# Altium PCB wacky-hat.PcbDoc (part 1 of 2)
Units mm, origin at the board's own origin, x right, y up, seen from the top; angles counter-clockwise.
Board outline 64 x 85 mm, 4 copper layers (Top Layer, Ground Plane, Power Plane, Bottom Layer), stack 0.844 mm thick; 113 components, 70 nets, 320 pads, 108 vias.
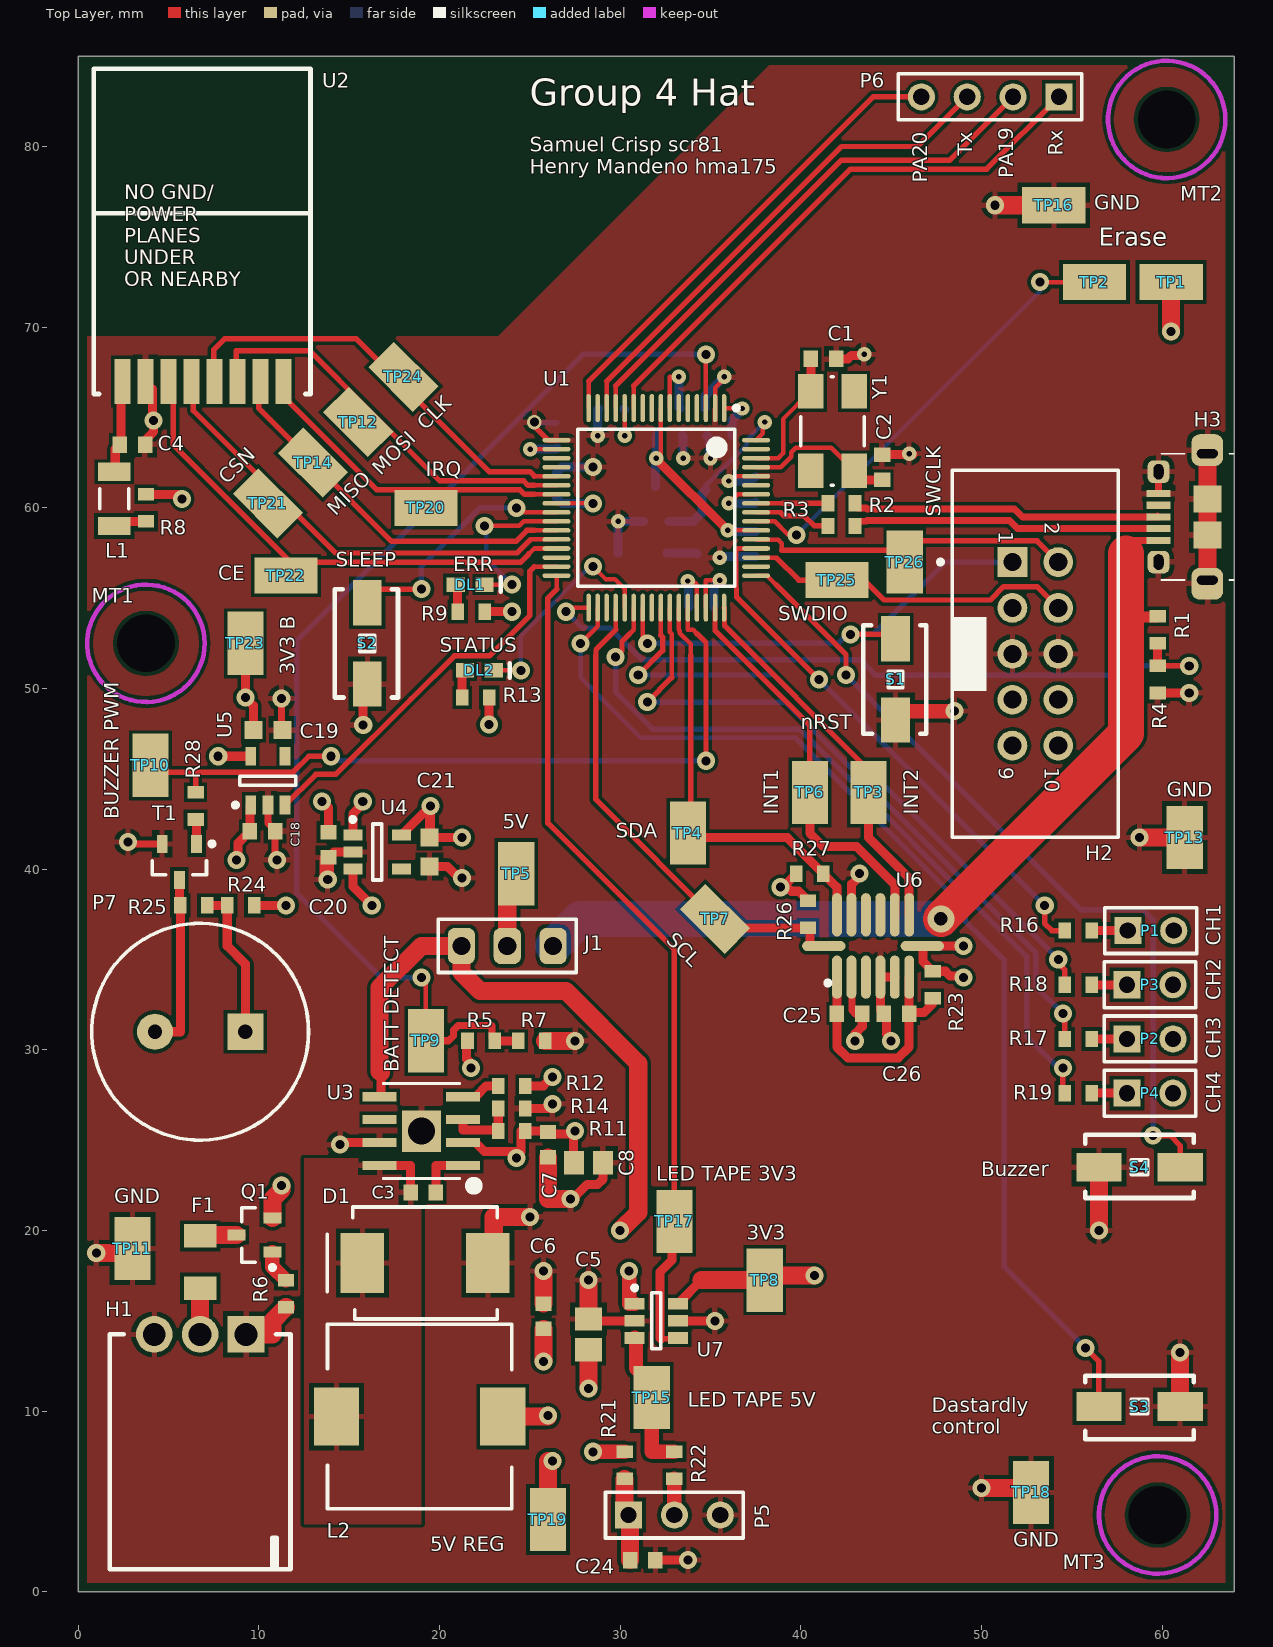
[diagram p0: Top Layer view]
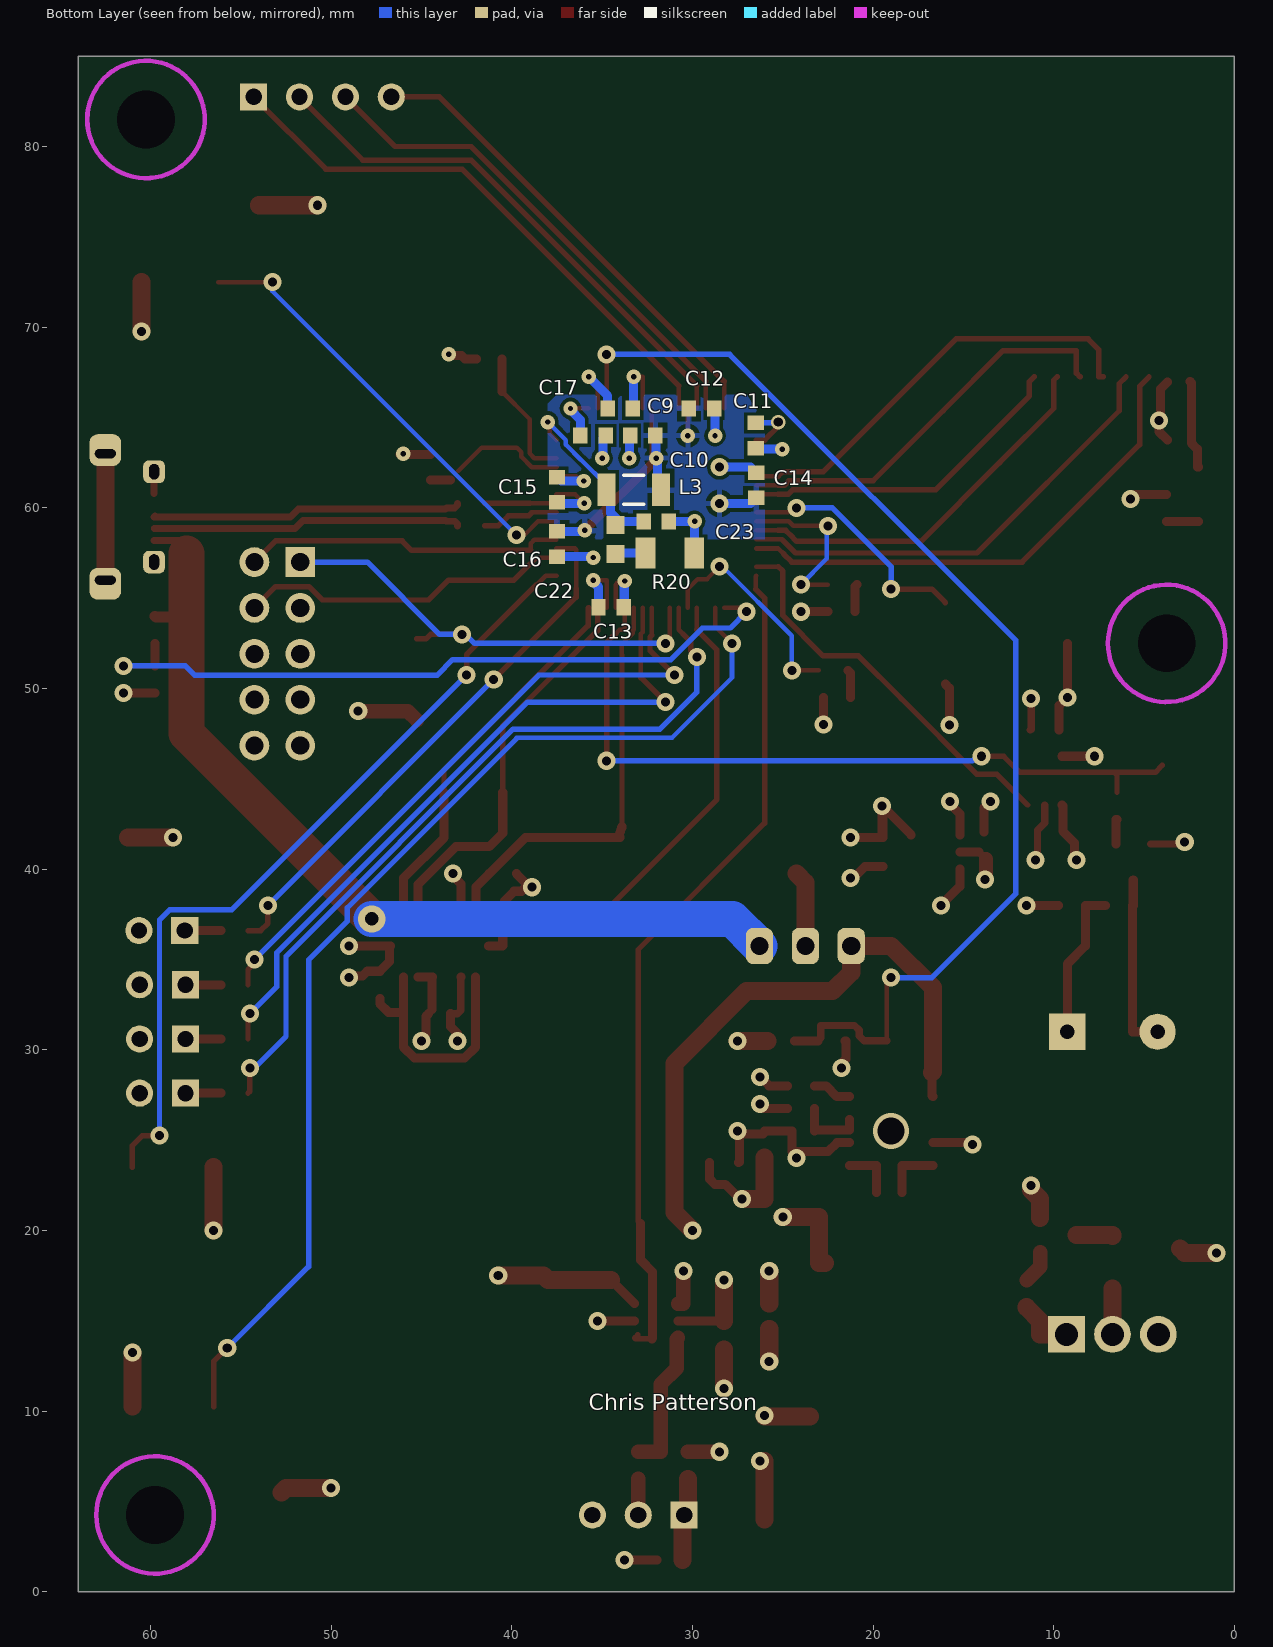
[diagram p1: Bottom Layer view, seen from below]
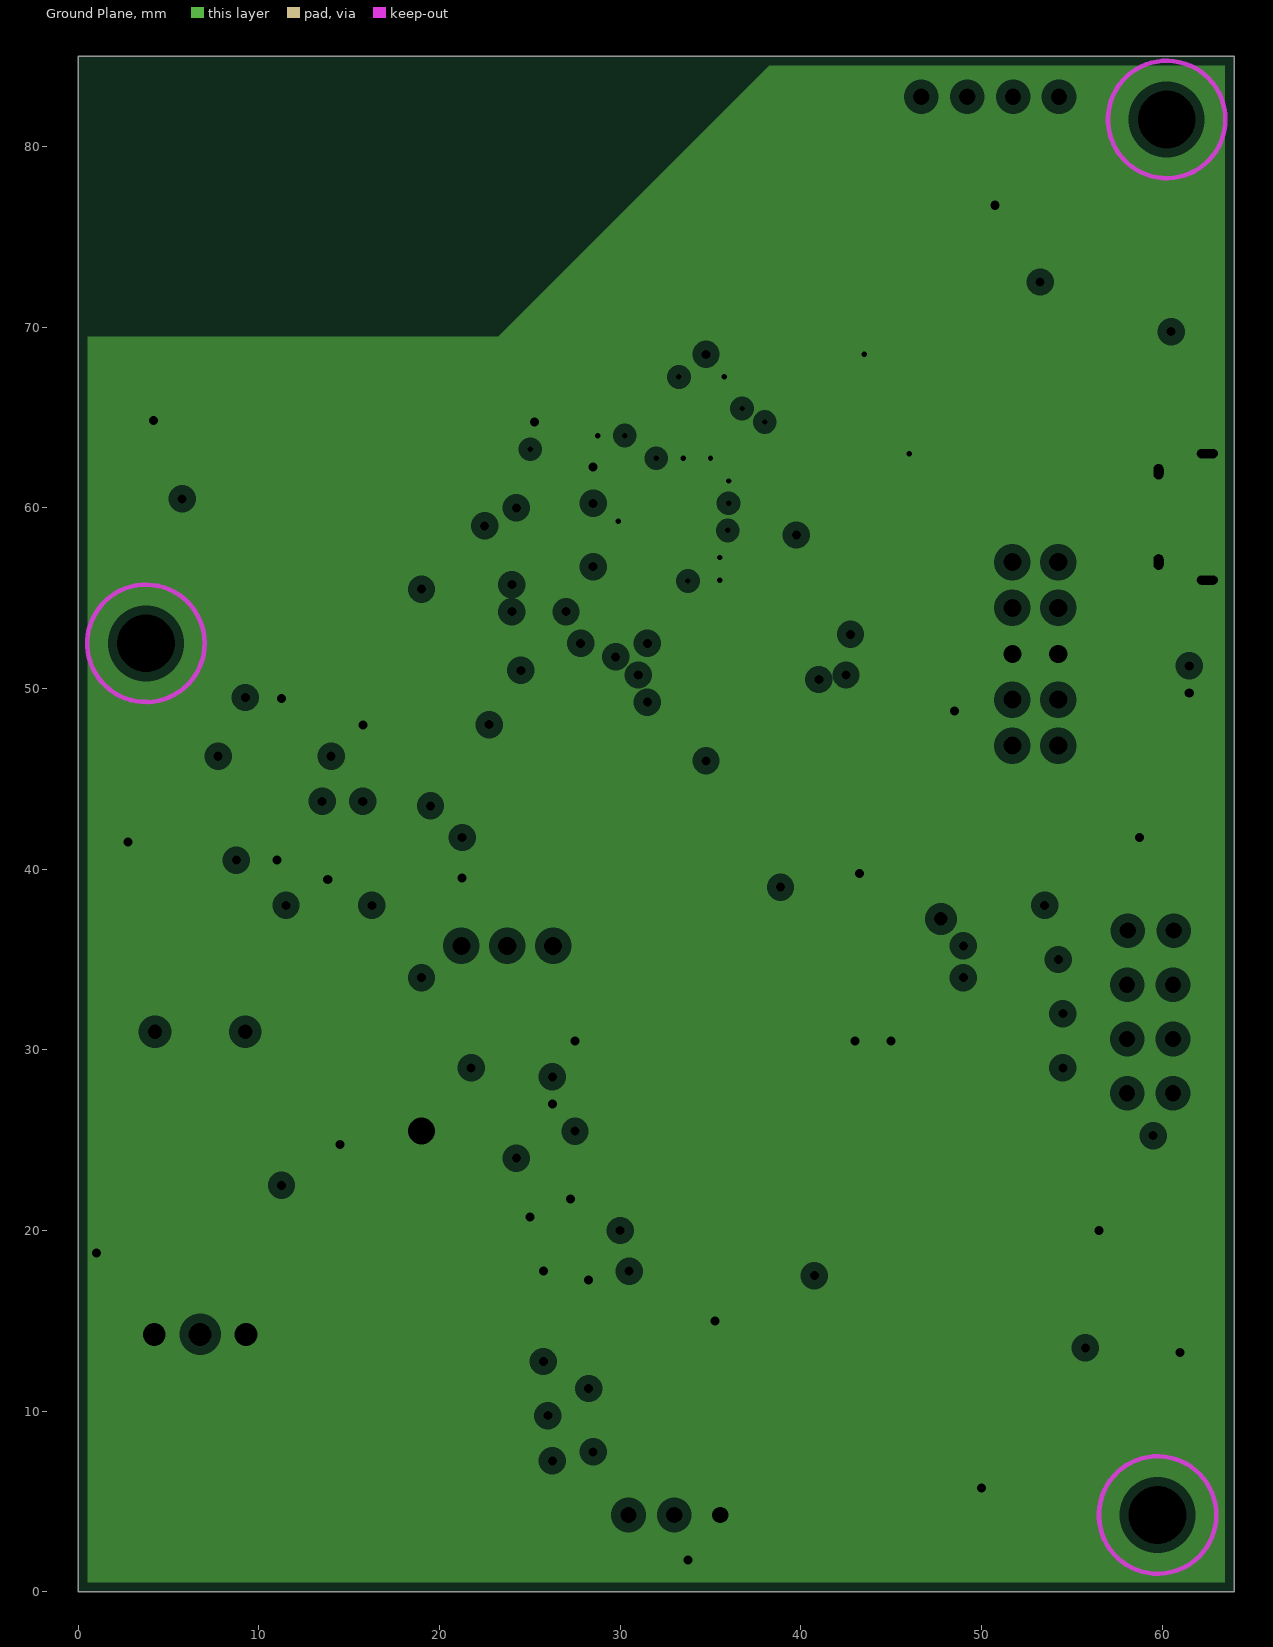
[diagram p2: Ground Plane, clearances drawn from the general rule]
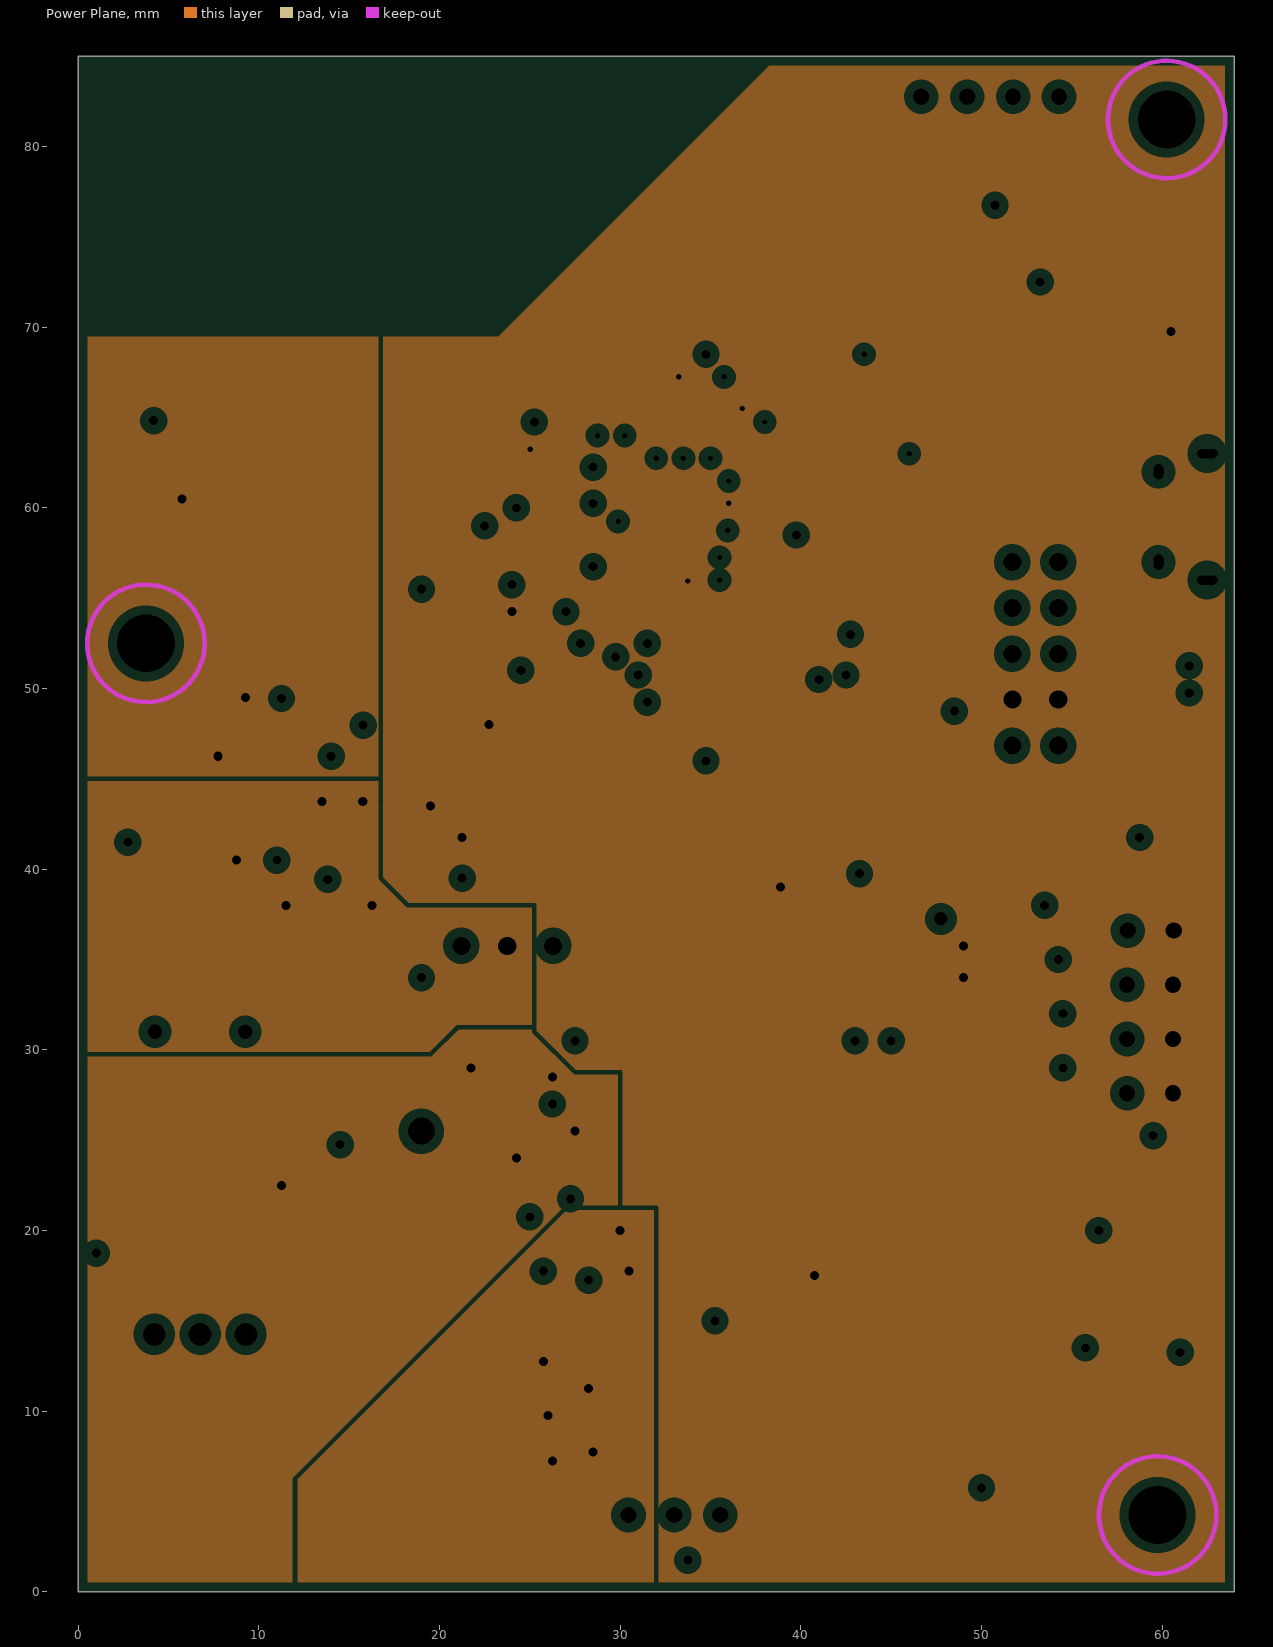
[diagram p3: Power Plane, clearances drawn from the general rule]

## Layer stack, top to bottom
Top Solder: solder mask 0.0102, Solder Resist, Dk 3.5
Top Layer: signal copper 0.0356
Dielectric 1: core 0.32, FR-4, Dk 4.8
Ground Plane: plane copper 0.036, net GND
Dielectric 3: prepreg 0.127, Dk 4.2
Power Plane: plane copper 0.036, net (Multiple Nets)
Dielectric 4: core 0.254, Dk 4.2
Bottom Layer: signal copper 0.0356
Bottom Solder: solder mask 0.0102, Solder Resist, Dk 3.5

## Board outline
0,85 64,85 64,0 0,0 0,85

## Design rules (kind name [scope] priority, off if disabled: settings)
BoardOutlineClearance [All] p1: gap=0.5 ignorepadtopadclearanceinfootprint=FALSE
Clearance GND_POLY [InNamedPolygon('GND')] p1: gap=0.254 ignorepadtopadclearanceinfootprint=FALSE
Clearance Min_Clearance_Circuit_Labs [All] p2: gap=0.2 ignorepadtopadclearanceinfootprint=FALSE
DiffPairsRouting [All] p1: maxlimit=0.254 minlimit=0.254 mostfreqgap=0.254 toplayer_minwidth=0.381 toplayer_maxwidth=0.381 toplayer_prefwidth=0.381 bottomlayer_minwidth=0.381 bottomlayer_maxwidth=0.381 bottomlayer_prefwidth=0.381 maxuncoupledlength=12.7
FanoutControl Fanout_BGA [IsBGA] p1 off: bgadir=Out bgaviamode=Centered fanoutstyle=Auto fanoutdirection=Alternating viagrid=0.025 // Fanout_BGA (Default Rule)
Height [All] p1: minheight=0 maxheight=50.8 prefheight=12.7
HoleSize [All] p1: absolutevalues=TRUE maxlimit=10 minlimit=0.3 maxpercent=80.000 minpercent=20.000
MinimumAnnularRing [All] p1: minimumring=0.1
MinimumSolderMaskSliver [All] p1: minsoldermaskwidth=0.102
NetAntennae [All] p1: netantennaetolerance=1
PlaneClearance [All] p1: clearance=0.508
PlaneConnect [All] p1: planeconnectstyle=Relief reliefexpansion=0.508 reliefentries=4 reliefconductorwidth=0.254 reliefairgap=0.254
PolygonConnect [All] p1: connectstyle=Relief reliefconductorwidth=0.305 reliefentries=4 polygonreliefangle="90 Angle" airgapwidth=0.254
RoutingVias [All] p1: holewidth=0.5 width=1 viastyle="Through Hole" minholewidth=0.3 minwidth=0.8 maxholewidth=1 maxwidth=2
SMDNeckDown [All] p1 off: percent=50.000
SMDToCorner [All] p1: distance=98425
SMDToPlane [All] p1: distance=1968504
SilkToSolderMaskClearance SilkscreenOverComponentPads [IsPad] p1: minsilkscreentomaskgap=0.2 clearancetoexposedcopper=TRUE
SolderMaskExpansion [All] p1: expansion=0.102
ViasUnderSMD [All] p1: allowed=FALSE
Width [All] p1: maxlimit=2 minlimit=0.2 preferedwidth=0.3
21 further rules are at their usual default settings.

## Classes and differential pairs
differential pair class D_P: D
differential pair class D_N: D
differential pair D: +D_P -D_N

## Components (designator, comment, footprint, x,y, rotation, side; value= is the part's Value field where it differs from the comment)
C1 "27pF" CAPC1608L 41.25,68.25 r180 top
C2 "27pF" CAPC1608L 44.5,62.25 r270 top
C3 "100nF" CAPC1608L 19.1,22.1 r180 top
C4 "10uF" CAPC1608L 3,63.5 r180 top
C5 "CC_47uF_0805_6V3" CAPC2012N 28.25,14.25 r270 top
C6 "100nF" CAPC1608L 25.75,15.25 r270 top
C7 "100nF" CAPC1608L 26,24.75 r90 top
C8 "10uF" CAPC2012L 28.25,23.75 r180 top
C9 "100nF" CAPC1608L 34,65.5 r180 bottom
C10 "100nF" CAPC1608L 32.75,64 r180 bottom
C11 "100nF" CAPC1608L 26.5,64 r270 bottom
C12 "100nF" CAPC1608L 29.5,65.5 r0 bottom
C13 "100nF" CAPC1608L 34.5,54.5 r180 bottom
C14 "100nF" CAPC1608L 26.475,61.25 r270 bottom
C15 "100nF" CAPC1608L 37.5,61 r270 bottom
C16 "100nF" CAPC1608L 37.5,58 r90 bottom
C17 "100nF" CAPC1608L 35.5,64 r0 bottom
C18 "1uF" CAPC1608L 10.2,42.1 r180 top
C19 "4.7uF" CAPC1608N 10.5,47.7 r180 top
C20 "1uF" CAPC1608L 13.85,41.35 r90 top
C21 "4.7uF" CAPC1608N 19.45,40.95 r90 top
C22 "4.7uF" CAPC1608N 34.25,58.25 r270 bottom
C23 "100nF" CAPC1608L 32,59.25 r0 bottom
C24 "15pF" CAPC1608L 31.25,1.75 r180 top
C25 "100nF" CAPC1608L 42.7,32 r180 top
C26 "1uF" CAPC1608L 45.3,32 r0 top
D1 "MBRS330T3G 30V 4A" SMC 19.2,18.2 r180 top
DL1 "Red" WL-SMCW0603 22.5,55.75 r180 top
DL2 "Green" WL-SMCW0603 23,51 r180 top
F1 "5A" RESC3216N 6.75,18.25 r90 top
H1 "Battery_HEADER_3pin" BATT_HEADER_3POS 6.75,14.25 r180 top
H2 "Header 5X2 Vert" IDC2.54-V10D 52.98,51.92 r270 top
H3 "JS_USB_MICRO_B" FCI_USB_10118194-0001LF 63.95,59.5 r90 top
J1 "100Mil Jumper" JMP2.54-CO 21.21,35.75 r0 top
L1 "1A max, Idc 0.3R," INDC3216L 2,60.5 r270 top
L2 "IND 5.2UH 6A" INDUCTOR5u2 18.9,9.7 r0 top
L3 "1A max, Idc 0.3R," INDC3216L 33.25,61 r180 bottom
MT1 "M3.2 NPTH" MNT-HOLE_3.2mm_NPTH 3.75,52.5 r0 top
MT2 "M3.2 NPTH" MNT-HOLE_3.2mm_NPTH 60.25,81.5 r0 top
MT3 "M3.2 NPTH" MNT-HOLE_3.2mm_NPTH 59.75,4.25 r0 top
P1 "JA_PIN_Header 2" HDR1X2 58.1,36.6 r0 top
P2 "JA_PIN_Header 2" HDR1X2 58.06,30.6 r0 top
P3 "JA_PIN_Header 2" HDR1X2 58.06,33.6 r0 top
P4 "JA_PIN_Header 2" HDR1X2 58.06,27.6 r0 top
P5 "JA_PIN_Header 3" HDR1X3 30.46,4.25 r0 top
P6 "JA_PIN_Header 4" HDR1X4 54.29,82.75 r180 top
P7 "Piezo Buzzer" BUZZER 9.25,31 r180 top
Q1 "SSM3J328R,LF" SOT23_L 9.75,19.75 r180 top
R1 "62K" RESC1608L 59.75,53.25 r90 top
R2 "27R" RESC1608L 42.25,60.25 r180 top
R3 "27R" RESC1608L 42.25,59 r180 top
R4 "110K" RESC1608L 59.75,50.5 r90 top
R5 "390K" RESC1608L 22.3,30.5 r180 top
R6 "100K" RESC1608L 11.5,16.5 r90 top
R7 "330K" RESC1608L 25.1,30.5 r180 top
R8 "0R" RESC1608L 3.75,60 r90 top
R9 "3K" RESC1608L 21.75,54.25 r180 top
R11 "510K" RESC1608L 24,25.5 r0 top
R12 "100K" RESC1608L 24,28 r0 top
R13 "2K" RESC1608L 22,49.5 r180 top
R14 "160K" RESC1608L 24,26.75 r180 top
R16 "1K" RESC1608L 55.35,36.6 r0 top
R17 "1K" RESC1608L 55.35,30.6 r0 top
R18 "1K" RESC1608L 55.35,33.6 r0 top
R19 "1K" RESC1608L 55.35,27.6 r0 top
R20 "1R" RESC3216L 31.25,57.5 r0 bottom
R21 "0R" RESC1608L 30.25,7 r270 top
R22 "51R" RESC1608L 33,7 r270 top
R23 "0R" RESC1608L 47.3,33.6 r270 top
R24 "0R" RESC1608L 9,38 r0 top
R25 "1K" RESC1608L 6.4,38 r0 top
R26 "2K2" RESC1608L 40.4,37.5 r90 top
R27 "2K2" RESC1608L 40.5,39.75 r180 top
R28 "10R" RESC1608L 6.5,43.5 r270 top
S1 "EVQPNF05M" EVQPNF05M 45.25,50.5 r90 top
S2 "EVQPNF05M" EVQPNF05M 16,52.5 r90 top
S3 "EVQPNF05M" EVQPNF05M 58.75,10.25 r180 top
S4 "EVQPNF05M" EVQPNF05M 58.75,23.5 r0 top
T1 "BSH105,215" SOT23_L 5.6,40.4 r270 top
TP1 "3V3" TP_1206 60.5,72.5 r0 top value=TP
TP2 "ERASE" TP_1206 56.25,72.5 r0 top value=TP
TP3 "ACCEL INT 1" TP_1206 43.75,44.25 r90 top value=TP
TP4 "SDA" TP_1206 33.75,42 r90 top value=TP
TP5 "5V" TP_1206 24.25,39.75 r270 top value=TP
TP6 "ACCEL INT 2" TP_1206 40.5,44.25 r90 top value=TP
TP7 "SCL" TP_1206 35.25,37.25 r135 top value=TP
TP8 "3.3V" TP_1206 38,17.25 r90 top value=TP
TP9 "BATTERY DETECT" TP_1206 19.25,30.5 r90 top value=TP
TP10 "BUZZ" TP_1206 4,45.75 r270 top value=TP
TP11 "GND" TP_1206 3,19 r90 top value=TP
TP12 "MOSI" TP_1206 15.5,64.75 r315 top value=TP
TP13 "GND" TP_1206 61.25,41.75 r90 top value=TP
TP14 "MISO" TP_1206 13,62.5 r315 top value=TP
TP15 "LED Tape 5V" TP_1206 31.75,10.75 r270 top value=TP
TP16 "GND" TP_1206 54,76.75 r180 top value=TP
TP17 "LED Tape 3.3V" TP_1206 33,20.5 r90 top value=TP
TP18 "GND" TP_1206 52.75,5.5 r90 top value=TP
TP19 "5V_REG" TP_1206 26,4 r90 top value=TP
TP20 "IRQ" TP_1206 19.25,60 r180 top value=TP
TP21 "CSN" TP_1206 10.5,60.25 r315 top value=TP
TP22 "RADIO CE" TP_1206 11.5,56.25 r180 top value=TP
TP23 "3.3V B" TP_1206 9.25,52.5 r90 top value=TP
TP24 "CLK" TP_1206 18,67.25 r135 top value=TP
TP25 "SWDIO" TP_1206 42,56 r180 top value=TP
TP26 "SWCLK" TP_1206 45.75,57 r90 top value=TP
U1 "ATSAM4S8BA-ANR" LQFP64_L 32,60 r270 top locked
U2 "nRF24 SMD" NRF24 0.857,66.3 r0 top
U3 "ADP2302ARDZ-5.0 BUCK" RD_8_1 19,25.5 r180 top locked value=Value
U4 "CAT6219-330TDGT3" SOT95P280X145-5N 16.549,40.95 r0 top
U5 "CAT6219-330TDGT3" SOT95P280X145-5N 10.5,44.9 r90 top
U6 "ADXL345BCCZ" ADI-CC-14-1_V 44,35.75 r90 top locked
U7 "SN74LVC1T45" SOT23-6_N 32,15 r0 top
Y1 "12MHz" 6.0X3.5-4 41.75,64.25 r90 top

## Footprints (in the part's own frame and the unit in brackets; to place one, negate y for a bottom-side part, rotate by r counter-clockwise, add the part's x,y. Pads: shape width x height; smd on the part's side, far side on the other; paste and mask are expansions set on the pad)
6.0X3.5-4 [mm] "4 SMD 6.0X3.5 mm No Lead Crystal"
  rect 1.9x1.4 smd: 1(-2.2,-1.2) 2(2.2,-1.2) 3(2.2,1.2) 4(-2.2,1.2)
  silkscreen extent -3,-1.75 3,1.75, body extent -3,-1.75 3,1.75, height 1.2
ADI-CC-14-1_V [mm]
  oval 2.4x0.55 smd: 1(-1.725,2) 2(-1.725,1.2) 3(-1.725,0.4) 4(-1.725,-0.4) 5(-1.725,-1.2) 6(-1.725,-2) 8(1.725,-2) 9(1.725,-1.2) 10(1.725,-0.4) 11(1.725,0.4) 12(1.725,1.2) 13(1.725,2)
  oval 0.55x2.4 smd: 7(0,-2.725) 14(0,2.725)
  silkscreen extent -2.18,2.37 -1.93,2.62, body extent -1.5,-2.5 1.5,2.5, height 1
BATT_HEADER_3POS [mil]
  rect 80x80 hole 50: 1(-100,0)
  round 80 hole 50: 2(0,0) 3(100,0)
  silkscreen extent -197,0 197,512, body extent -197,-31 200,504, height 294
BUZZER [mm]
  rect 2x2 hole 0.8: 1(0,0)
  round 2 hole 0.8: 2(5,0)
  silkscreen extent -3.5,-6 8.5,6, body extent -3.58,-6.08 8.58,6.08, height 6.5
CAPC1608L [mm] "Chip Capacitor, Body 1.6x0.8mm, IPC High Density"
  rect 0.8x0.9 smd: 1(-0.7,0) 2(0.7,0)
  body extent -0.87,-0.48 0.87,0.48, height 0.85
CAPC1608N [mm] "Chip Capacitor, Body 1.6x0.8mm, IPC Medium Density"
  rect 1x1 smd: 1(-0.8,0) 2(0.8,0)
  body extent -0.87,-0.48 0.87,0.48, height 0.85
CAPC2012L [mm] "Chip Capacitor, Body 2.0x1.3mm, IPC High Density"
  rect 1.1x1.3 smd: 1(-0.8,0) 2(0.8,0)
  body extent -1.1,-0.72 1.1,0.72, height 1.1
CAPC2012N [mm] "Chip Capacitor, Body 2.0x1.3mm, IPC Medium Density"
  rect 1.3x1.5 smd: 1(-0.85,0) 2(0.85,0)
  body extent -1.1,-0.72 1.1,0.72, height 1.1
EVQPNF05M [mm] "Panansonic light touch SMD push button switch"
  rect 2.5x1.6 smd: 1(-2.25,0) 2(2.25,0)
  silkscreen extent -3,-1.7 3,1.8, body extent -3,-1.7 3,1.8, height 5
FCI_USB_10118194-0001LF [mm] "Micro USB B Type Receptacle"
  rect 0.4x1.35 smd mask+0.07: 1(-1.3,4.15) 2(-0.65,4.15) 3(0,4.15) 4(0.65,4.15) 5(1.3,4.15)
  rrect50% 1.75x1.75 hole 0.5 slot 1.15 at 90 deg copper offset -0.2,0 paste+0 mask+0.1: 6(-3.5,1.45)
  rrect50% 1.25x1.2 hole 0.55 slot 0.85 at 0 deg: 6(-2.5,4.15) 6(2.5,4.15)
  rect 1.5x1.55 smd: 6(-1,1.45) 6(1,1.45)
  rrect50% 1.75x1.75 hole 0.5 slot 1.15 at 90 deg copper offset 0.2,0 paste+0 mask+0.1: 6(3.5,1.45)
  silkscreen extent -3.5,0 3.5,4
HDR1X2 [mm] "Connector; Header; 2 Position"
  rect 1.5x1.5 hole 0.9: 1(0,0)
  round 1.5 hole 0.9: 2(2.54,0)
  silkscreen extent -1.27,-1.27 3.81,1.27, body extent -1.25,-1.25 3.79,1.25, height 8.54
HDR1X3 [mm] "Connector; Header; 3 Position"
  rect 1.5x1.5 hole 0.9: 1(0,0)
  round 1.5 hole 0.9: 2(2.54,0) 3(5.08,0)
  silkscreen extent -1.27,-1.27 6.35,1.27, body extent -1.27,-1.27 6.35,1.27, height 8.89
HDR1X4 [mm] "Connector; Header; 4 Position"
  rect 1.5x1.5 hole 0.9: 1(0,0)
  round 1.5 hole 0.9: 2(2.54,0) 3(5.08,0) 4(7.62,0)
  silkscreen extent -1.27,-1.27 8.89,1.27, body extent -1.26,-1.3 8.86,1.2, height 2.1
IDC2.54-V10D [mm] "Connector; IDC, Low Profile Male Header, Thru-Hole; 10 Position; Vertical; Pitch 2.54 mm; Body 20.32 x 9.2 x 9.45 mm (LxWxH)"
  rect 1.65x1.65 hole 1: 1(-5.08,-1.27)
  round 1.65 hole 1: 2(-5.08,1.27) 3(-2.54,-1.27) 4(-2.54,1.27) 5(0,-1.27) 6(0,1.27) 7(2.54,-1.27) 8(2.54,1.27) 9(5.08,-1.27) 10(5.08,1.27)
  silkscreen extent -10.16,-5.37 10.16,4.6, body extent -10.16,-4.6 10.16,4.6, height 9.45
INDC3216L [mm] "Chip Inductor, Body 3.2x1.6mm, IPC High Density"
  rect 1x1.8 smd: 1(-1.5,0) 2(1.5,0)
  silkscreen extent -0.55,-0.8 0.55,0.8, body extent -1.75,-0.95 1.75,0.95, height 1.9
INDUCTOR5u2 [mm]
  rect 2.5x3.2 smd: 1(-4.6,0) 2(4.6,0)
  silkscreen extent -5.1,-5.1 5.1,5.1, body extent -5,-5 5,5, height 3.8
JMP2.54-CO [mm] "Jumper Change over 2.54mm"
  rrect50% 1.5x2 hole 1: 1(0,0) 2(2.54,0) 3(5.08,0)
  silkscreen extent -1.27,-1.47 6.35,1.47, body extent -1.27,-1.43 6.36,1.43, height 8.45
LQFP64_L [mm] "Thin QFP, 64-Leads, Body 10x10mm, Pitch 0.5mm, IPC High Density"
  oval 1.55x0.25 smd mask+0.07: 1(-5.525,3.75) 2(-5.525,3.25) 3(-5.525,2.75) 4(-5.525,2.25) 5(-5.525,1.75) 6(-5.525,1.25) 7(-5.525,0.75) 8(-5.525,0.25) 9(-5.525,-0.25) 10(-5.525,-0.75) 11(-5.525,-1.25) 12(-5.525,-1.75) 13(-5.525,-2.25) 14(-5.525,-2.75) 15(-5.525,-3.25) 16(-5.525,-3.75) 33(5.525,-3.75) 34(5.525,-3.25) 35(5.525,-2.75) 36(5.525,-2.25) 37(5.525,-1.75) 38(5.525,-1.25) 39(5.525,-0.75) 40(5.525,-0.25) 41(5.525,0.25) 42(5.525,0.75) 43(5.525,1.25) 44(5.525,1.75) 45(5.525,2.25) 46(5.525,2.75) 47(5.525,3.25) 48(5.525,3.75)
  oval 0.25x1.55 smd mask+0.07: 17(-3.75,-5.525) 18(-3.25,-5.525) 19(-2.75,-5.525) 20(-2.25,-5.525) 21(-1.75,-5.525) 22(-1.25,-5.525) 23(-0.75,-5.525) 24(-0.25,-5.525) 25(0.25,-5.525) 26(0.75,-5.525) 27(1.25,-5.525) 28(1.75,-5.525) 29(2.25,-5.525) 30(2.75,-5.525) 31(3.25,-5.525) 32(3.75,-5.525) 49(3.75,5.525) 50(3.25,5.525) 51(2.75,5.525) 52(2.25,5.525) 53(1.75,5.525) 54(1.25,5.525) 55(0.75,5.525) 56(0.25,5.525) 57(-0.25,5.525) 58(-0.75,5.525) 59(-1.25,5.525) 60(-1.75,5.525) 61(-2.25,5.525) 62(-2.75,5.525) 63(-3.25,5.525) 64(-3.75,5.525)
  silkscreen extent -5.65,-4.35 4.35,4.55, body extent -5,-5 5,5, height 1.6
MNT-HOLE_3.2mm_NPTH [mm] "Mounting Hole 3.2mm non plated"
  round 0 hole 3.2 unplated: 1(0,0)
  Keep-Out Layer circle w0.254: c0,0 r3.25
NRF24 [mm]
  rect 0.9x2.5 smd: 1(1.6,0.7) 2(2.871,0.7) 3(4.143,0.7) 4(5.414,0.7) 5(6.686,0.7) 6(7.957,0.7) 7(9.229,0.7) 8(10.5,0.7)
  silkscreen extent 0,0 12,18, body extent 0,0 12,18, height 2.27
RD_8_1 [mil]
  rect 74x20 smd paste+0 mask+0: 1(-91,75) 2(-91,25) 3(-91,-25) 4(-91,-75) 5(91,-75) 6(91,-25) 7(91,25) 8(91,75)
  rect 84.65x90 smd paste-44.5 mask+0: EPAD(0,0)
  silkscreen extent -118,-104 84,123, body extent 0,0 10,10, height 10
RESC1608L [mm] "Chip Resistor, Body 1.6x0.8mm, IPC High Density"
  rect 0.7x0.9 smd: 1(-0.75,0) 2(0.75,0)
  body extent -0.85,-0.48 0.85,0.48, height 0.9
RESC3216L [mm] "Chip Resistor, Body 3.1x1.6mm, IPC High Density"
  rect 1.1x1.7 smd: 1(-1.35,0) 2(1.35,0)
  body extent -1.68,-0.87 1.68,0.87, height 2.54
RESC3216N [mm] "Chip Resistor, Body 3.2x1.6mm, IPC Medium Density"
  rect 1.3x1.8 smd: 1(-1.45,0) 2(1.45,0)
  body extent -1.68,-0.87 1.68,0.87, height 0.71
SMC [mm] "DO-214-AB/SMC; 2 C-Bend Leads; Body 7.9 x 5.9 mm, inc. leads (LxW)"
  rect 2.4x3.3 smd: 1(-3.475,0) 2(3.475,0)
  silkscreen extent -4,-3.1 5.43,3.1, body extent -4.22,-2.95 3.72,2.95, height 2.27
SOT23-6_N [mm]
  rect 1.1x0.65 smd: 1(-1.2,0.95) 2(-1.2,0) 3(-1.2,-0.95) 4(1.2,-0.95) 5(1.2,0) 6(1.2,0.95)
  silkscreen extent -1.32,-1.55 0.25,1.95, body extent -0.9,-1.55 0.9,1.55, height 1.45
SOT23_L [mm] "SOT23, 3-Leads, Body 2.9x1.3mm, Pitch 0.95mm, Lead Span 2.3mm, IPC High Density"
  rect 1x0.6 smd: 1(-1,0.95) 2(-1,-0.95) 3(1,0)
  silkscreen extent -1.13,-1.5 0.7,1.92, body extent -0.7,-1.5 0.7,1.5, height 1.1
SOT95P280X145-5N [mm] "SOT23, 5-Leads, Body 2.90x2.80mm, Pitch 0.95mm, IPC Medium Density"
  rect 1.05x0.6 smd: 1(-1.35,0.95) 2(-1.35,0) 3(-1.35,-0.95) 4(1.35,-0.95) 5(1.35,0.95)
  silkscreen extent -1.47,-1.55 0.25,1.92, body extent -0.87,-1.52 0.87,1.53, height 1.45
TP_1206 [mm] "Test Point Pad"
  rect 3.5x2 smd: 1(0,0)
  body extent -1.62,-0.85 1.63,0.8, height 2
WL-SMCW0603 [mm] "2.4 x 0.8 x 0.7mm LED"
  rect 1x0.8 smd: 1(0,0) 2(1.6,0)
  silkscreen extent -0.9,-0.4 -0.9,0.4

## Part data
C1 C2: library part CC_27pF_0603, "CAP CER 27pF NPO/COG +-5% 50V 0603", Code_IPC="1608 [0603]", PackageReference=0603, Storage Location="PCB Assembly WS", Supplier="ECE Dept"
C3 C6 C7 C9 C10 C11 C12 C13 C14 C15 C16 C17 C23 C25: library part CC_100nF_0603, "CAP CER 100nF X7R +-10% 50V 0603", Code_IPC="1608 [0603]", PackageReference=0603, Storage Location="PCB Assembly WS", Supplier="ECE Dept"
C4: library part CC_10uF_0603, "CAP CER 10UF X5R +-20% 6V3 0603", Voltage - Rated=6.3V, Storage Location="PCB Assembly WS", Supplier="ECE Dept"
C5: "SAMSUNG ELECTRO-MECHANICS - CL21A476MQCLRNC - CAP, 47UF, 6.3V, MLCC, 0805", Capacitance=47uF, Case/Package=0805, Case Code (Metric)=2012, Dielectric=X5R, Manufacturer 1=Samsung, Manufacturer Part Number 1=CL21A476MQCLRNC, Max Operating Temperature=85°C, Min Operating Temperature=-55°C, Package Quantity=4000, Supplier Part Number 1=1276-2420-1-ND, Tolerance=20%, Voltage Rating=6V3, Case Code (Imperial)=0805, ComponentLink1Description=https://datasheet.ciiva.com/25723/cl21a476mqclrnc-25723991.pdf?src-supplier=Digi-Key, ComponentLink1URL=https://datasheet.ciiva.com/25723/cl21a476mqclrnc-25723991.pdf?src-supplier=Digi-Key, Construction=Flat, Contact Plating=Tin, Depth=1.25mm, Lead Free="Lead Free", Length=2mm, Mount="Surface Mount", Packaging="Tape and Reel", Pricing 1="1=0.56000, 10=0.39100, 50=0.27380, 100=0.23470, 500=0.17602, 1000=0.14865 (USD)", RoHS=Yes, RoHS Compliant=Yes, Series=CL, Stock 1=94580, Supplier 1=Digi-Key, Termination=Wraparound, Thickness=0.037inch, Width=0.049inch
C8: library part CC_10uF_0805_16V, "CAP CER 10uF X5R 16V 0805", Manufacturer="Samsung Electro-Mechanics", Manufacturer Part Number=CL21A106KOQNNWE, Max Voltage=16V, Operating Temperature="-55°C ~ 85°C", Package / Case="0805 (2012 Metric)", Ratings=-, Supplier Part Number 1=1276-2894-1-ND, Temperature Coefficient=X5R, Tolerance=±10%, Applications="General Purpose", Category=Capacitors, Code_IPC=2012[0805], ComponentLink1Description=http://www.samsungsem.com/kr/support/product-search/mlcc/CL21A106KOQNNWE.jsp, ComponentLink1URL=http://www.samsungsem.com/kr/support/product-search/mlcc/CL21A106KOQNNWE.jsp, Features=-, Height - Seated (Max)=-, Lead Spacing=-, Lead Style=-, Mounting Type="Surface Mount, MLCC", Note="Footprint corresponds to dimensions for bulk cassette packaging. This case size has tightened tolerances.", Notification="Current market demand for these product types have resulted in fluctuating and extending lead times. Lead times may differ.", PackageReference=0805, Packaging="Cut Tape (CT)", Part Status=Active, Pricing 1="1=0.35, 10=0.25, 100=0.1178, 500=0.08254, 1000=0.06831 (NZD)", RoHS="RoHS Compliant", Size / Dimension="0.079\" L x 0.049\" W (2.00mm x 1.25mm)", Stock 1=20000, Supplier 1=Digi-Key, Thickness (Max)="0.055\" (1.40mm)", Voltage - Rated=16V
C18 C20 C26: library part CC_1uF_0603, "CAP CER 1uF Y5V -20% +80% 16V 0603", Max Voltage=16V, Code_IPC="1608 [0603]", PackageReference=0603, Storage Location="PCB Assembly WS", Supplier="ECE Dept"
C19 C21 C22: library part CC_4.7uF_0603, "CAP CER 4.7uF X5R +-20%  10V 0603", Max Voltage=10V, Code_IPC=2012[0805], Note="Footprint corresponds to dimensions for bulk cassette packaging. This case size has tightened tolerances.", PackageReference=0805, Storage Location="PCB Assembly WS", Supplier="ECE Dept"
C24: library part CC_15pF_0603, "CAP CER 15pF NPO/COG +-5% 50V 0603", Code_IPC="1608 [0603]", PackageReference=0603, Storage Location="PCB Assembly WS", Supplier="ECE Dept"
D1: library part MBRS330T3G, "SCHOTTKY  30V 4A", Base Part Number=MBRS330, Capacitance @ Vr, F=-, Current - Average Rectified (Io)=4A, Manufacturer="ON Semiconductor", Operating Temperature - Junction="-65°C ~ 150°C", Package / Case="DO-214AB, SMC", Supplier Device Package=SMC, Supplier Part Number 1=MBRS330T3GOSCT-ND, Category="Discrete Semiconductor Products", ComponentLink1Description=http://www.onsemi.com/pub/Collateral/MBRS340T3-D.PDF, ComponentLink1URL=http://www.onsemi.com/pub/Collateral/MBRS340T3-D.PDF, Diode Type=Schottky, Manufacturer Part Number=MBRS330T3G, Mounting Type="Surface Mount", Packaging="Cut Tape (CT)", Part Status=Active, Pricing 1="1=0.93, 10=0.79, 100=0.5902, 500=0.46368, 1000=0.35829 (NZD)", RoHS="RoHS Compliant", Speed="Fast Recovery =< 500ns, > 200mA (Io)", Stock 1=8919, Supplier 1=Digi-Key
DL1: library part DL_150060RS75000, "LED Red 250mcd 0603 SMD", Forward Current If=30, Forward Voltage=2, Manufacturer="WURTH ELEKTRONIK", Manufacturer Part Number=150060RS75000, Supplier Part Number 1=2322071, LED Colour=Red, LED Mounting=SMD, Lens Shape=Rectangular, Luminous Intensity=250, Storage Location="PCB Assembly WS", Supplier="ECE Dept", Supplier 1=Farnell, Viewing Angle=140°, Wavelength Typ=625
DL2: library part DL_150060GS75000, "LED Green 430mcd 0603 SMD", Forward Current If=30, Forward Voltage=3.2, Manufacturer="WURTH ELEKTRONIK", Manufacturer Part Number=150060GS75000, Supplier Part Number 1=2322070, LED Colour=Green, LED Mounting=SMD, Lens Shape=Rectangular, Luminous Intensity=430, Storage Location="PCB Assembly WS", Supplier="ECE Dept", Supplier 1=Farnell, Viewing Angle=140°, Wavelength Typ=520
F1: library part FS_Fuse_5.0A, "Fuse 5.0A Fast Acting 1206 SMD", Case/Package=1206, Case Code (Metric)=3216, DC Cold Resistance=19mR, Manufacturer="Bel TRP", Manufacturer Part Number=C1F5, Max Operating Temperature=125°C, Min Operating Temperature=-55°C, Supplier Part Number 1=507-1886-1-ND, Voltage Rating=125V, Voltage Rating (DC)=63V, Approvals=CE,cURus, Case Code (Imperial)=1206, ComponentLink1Description=http://www.farnell.com/datasheets/2571625.pdf, ComponentLink1URL=http://www.farnell.com/datasheets/2571625.pdf, ComponentLink2Description=http://belfuse.com/pdfs/C1F.pdf, ComponentLink2URL=http://belfuse.com/pdfs/C1F.pdf, ComponentLink3Description=http://www.mouser.com/ds/2/643/C1F-594910.pdf, ComponentLink3URL=http://www.mouser.com/ds/2/643/C1F-594910.pdf, ComponentLink4Description=https://belfuse.com/resources/StewartConnector/C1F.pdf, ComponentLink4URL=https://belfuse.com/resources/StewartConnector/C1F.pdf, Contact Plating=Nickel,Tin, Current Rating=5A, Fuse Type="Board Mount (Cartridge Style Excluded)", Length=0.126inch, Mount="Surface Mount", Number of Pins=2, Packaging="Tape and Reel", Pricing 1="1=0.32, 5=0.312, 10=0.298, 50=0.2662, 100=0.2479, 250=0.22032, 500=0.1836, 1000=0.17442 (USD)", Stock 1=725, Supplier 1=Digi-Key, Supplier 2=Element14, Supplier Part Number 2=2848595, Voltage Rating (AC)=125V, Width=0.062inch
H1: "3Pin Header 2.54mm spacing / Digikey #WM22663-ND", Supplier Part Number 1=WM22663-ND, Supplier 1=Digi-Key
H2: library part JA_HDR_IDC_5X2_VERT, "IDC Header, 2,54mm, 10-Pin, Vert", Supplier Part Number 1=1096985, Storage Location="ECE Dept Store", Supplier="ECE Dept", Supplier 1=Farnell
H3: library part JS_USB_MICRO_B_SMT, "CONN USB MICRO B RECPT SMT R/A", Manufacturer=FCI, Manufacturer Part Number=10118194-0001LF, Supplier Part Number 1=609-4618-1-ND, Features="Shielded, Solder Retention", Gender=Receptacle, Mounting Type="Surface Mount, Right Angle, Horizontal", Number of Contacts=5, Specifications="USB 2.0", Supplier 1=Digi-Key
J1: library part TP_JUMPER_CO, "2.54mm Jumper change over, Thru Hole", Storage Location="ECE$ Store", Supplier="ECE Dept"
L1 L3: library part IN_Ferrite-Bead, "Ferrite Bead, Rdc 0.3R, Z100MHZ 600R, Imax 1A, SMD 1206", DC Current Rating=1, DC Resistance Max=0.08, Ferrite Case Style="1206 ^3216 Metric]", Frequency Range="50MHz to 1", Impedance Tolerance="± 25%", Manufacturer=FAIR-RITE, Manufacturer Part Number=2512066017Y1, Supplier Part Number 1=1612060, Ferrite Mounting=SMD, Impedance=600, Manufacturer PN=2512066017Y1, Storage Location="PCB Assembly WS", Supplier="ECE Dept", Supplier 1=Farnell
L2: library part CDRH104RNP-5R2NC, "FIXED IND 5.2UH 6A 22 MOHM SMD", Current - Saturation=5.6A, DC Resistance (DCR)="22 mOhm Max", Frequency - Self Resonant=-, Manufacturer="Sumida America Components Inc.", Operating Temperature="-40°C ~ 100°C", Package / Case=Nonstandard, Supplier Part Number 1=308-2280-1-ND, Tolerance=±30%, Category="Inductors, Coils, Chokes", ComponentLink1Description=http://products.sumida.com/products/pdf/CDRH104R.pdf, ComponentLink1URL=http://products.sumida.com/products/pdf/CDRH104R.pdf, Height - Seated (Max)="0.157\" (4.00mm)", Manufacturer Part Number=CDRH104RNP-5R2NC, Material - Core=Ferrite, Mounting Type="Surface Mount", Packaging="Cut Tape (CT)", Part Status=Active, Pricing 1="1=2.9, 10=2.678, 100=1.8743, 500=1.5173 (NZD)", Q @ Freq=-, Ratings=-, RoHS="RoHS Compliant", Shielding=Shielded, Size / Dimension="0.402\" L x 0.394\" W (10.20mm x 10.00mm)", Stock 1=3849, Supplier 1=Digi-Key, Supplier Device Package=-, Type=-
MT1 MT2 MT3: library part MC_M3.2_HOLE, "Fixing M3.2 Mount Hole NPTH", Manufacturer=Hi-Q, Manufacturer PN="3BV series M3 Clearance", Price=0, Supplier="ECE Dept"
P1 P2 P3 P4: "Header, 2-Pin", LatestRevisionDate=17-Jul-2002, LatestRevisionNote="Re-released for DXP Platform.", Publisher="Altium Limited"
P5: "Header, 3-Pin", LatestRevisionDate=17-Jul-2002, LatestRevisionNote="Re-released for DXP Platform.", Publisher="Altium Limited"
P6: "Header, 4-Pin", LatestRevisionDate=17-Jul-2002, LatestRevisionNote="Re-released for DXP Platform.", Publisher="Altium Limited"
P7: "TDK - PS1240P02BT - BUZZER, PIEZO, 70DB, 12.2MM", Frequency=4kHz, Manufacturer 1=TDK, Manufacturer Part Number 1=PS1240P02BT, Max Operating Temperature=70°C, Min Operating Temperature=-10°C, Operating Supply Voltage=3V, Package Quantity=1, Supplier Part Number 1=445-2525-1-ND, ComponentLink1Description=https://datasheet.ciiva.com/0/ef532-ps-112.pdf?src-supplier=Digi-Key, ComponentLink1URL=https://datasheet.ciiva.com/0/ef532-ps-112.pdf?src-supplier=Digi-Key, ComponentLink2Description=https://datasheet.ciiva.com/0/ef532-ps-111.pdf?src-supplier=Digi-Key, ComponentLink2URL=https://datasheet.ciiva.com/0/ef532-ps-111.pdf?src-supplier=Digi-Key, ComponentLink3Description=https://datasheet.ciiva.com/3306/ef532-ps-3306958.pdf?src-supplier=Avnet, ComponentLink3URL=https://datasheet.ciiva.com/3306/ef532-ps-3306958.pdf?src-supplier=Avnet, ComponentLink4Description=https://datasheet.ciiva.com/16225/ef532-ps-16225062.pdf?src-supplier=Onlinecomponents.com, ComponentLink4URL=https://datasheet.ciiva.com/16225/ef532-ps-16225062.pdf?src-supplier=Onlinecomponents.com, Diameter=12.2mm, Height=6.5mm, Lead Free="Lead Free", Mount="Through Hole", Number of Pins=2, Number of Terminals/Pins=2, Packaging="Tape and Reel", Pricing 1="1=0.61000, 10=0.52500, 25=0.49120, 50=0.46580, 100=0.44110 (USD)", RoHS=Yes, RoHS Compliant=Yes, Series=PS, Stock 1=24025, Supplier 1=Digi-Key, Termination="PC Pins", Voltage Rating (DC)=3V, Washable=No
Q1: library part TM_SSM3J328R, "MOSFET P-CH 20V 6A SOT23-3", Case/Package=SOT-23-3, Continuous Drain Current (ID)=6A, Drain to Source Breakdown Voltage=-20V, Drain to Source Resistance=47.4mR, Drain to Source Voltage (Vdss)=20V, Gate to Source Voltage (Vgs)=8V, Input Capacitance=840pF, Input Capacitance (Ciss) @ Vds="840pF @ 10V", Manufacturer=Toshiba, Max Operating Temperature=150°C, Max Power Dissipation=1W, Min Operating Temperature=-55°C, Package / Case="SOT-23-3 Flat Leads", Package Quantity=3000, Power Dissipation=2W, Supplier Device Package=SOT-23F, Supplier Part Number=SSM3J328RLFDKR-ND, ComponentLink1Description=https://datasheet.ciiva.com/11158/ssm3j328r-datasheet-en-20140301-11158652.pdf, ComponentLink1URL=https://datasheet.ciiva.com/11158/ssm3j328r-datasheet-en-20140301-11158652.pdf, Current - Continuous Drain (Id) @ 25° C=6A, Element Configuration=Single, FET Feature="Logic Level Gate, 1.5V Drive", FET Type="MOSFET P-Channel, Metal Oxide", Gate Charge (Qg) @ Vgs="12.8nC @ 4.5V", Manufacturer Part Number=SSM3J328R,LF, Mount="Surface Mount", Number of Channels=1, Number of Elements=1, Number of Pins=3, Packaging="Tape and Reel", Power - Max=1W, Pricing="1=0.79, 10=0.658, 25=0.5772, 100=0.4939, 250=0.42836, 500=0.36284, 1000=0.27972 (NZD)", Radiation Hardening=No, Rds On Max=29.8mR, Storage Location="PCB Assembly WS", Supplier=Digi-Key, Supplier 1=Digi-Key, Supplier Part Number 1=SSM3J328RLFDKR-ND, Turn-Off Delay Time=107ns, Turn-On Delay Time=32ns, Vgs(th) (Max) @ Id="1V @ 1mA"
R1: library part RS_62K, "RES 62.0K OHM 1/10W 5% 0603 SMD", Storage Location="PCB Assembly WS", Supplier="ECE Dept"
R2 R3: library part RS_27R, "RES 27 OHM 1/10W 5% 0603 SMD", Storage Location="PCB Assembly WS", Supplier="ECE Dept"
R4: library part RS_110K, "RES 110K OHM 1/10W 5% 0603 SMD", Storage Location="PCB Assembly WS", Supplier="ECE Dept"
R5: library part RS_390K, "RES 390K OHM 1/10W 5% 0603 SMD", Storage Location="PCB Assembly WS", Supplier="ECE Dept"
R6 R12: library part RS_100K, "RES 100K OHM 1/10W 5% 0603 SMD", Storage Location="PCB Assembly WS", Supplier="ECE Dept"
R7: library part RS_330K, "RES 330K OHM 1/10W 5% 0603 SMD", Storage Location="PCB Assembly WS", Supplier="ECE Dept"
R8 R21 R23 R24: library part RS_0R0, "RES 0.0 OHM 1/10W 5% 0603 SMD", Storage Location="PCB Assembly WS", Supplier="ECE Dept"
R9: library part RS_3K, "RES 3K OHM 1/10W 5% 0603 SMD", Storage Location="PCB Assembly WS", Supplier="ECE Dept"
R11: library part RS_510K, "RES 510K OHM 1/10W 5% 0603 SMD", Storage Location="PCB Assembly WS", Supplier="ECE Dept"
R13: library part RS_2K, "RES 2K OHM 1/10W 5% 0603 SMD", Storage Location="PCB Assembly WS", Supplier="ECE Dept"
R14: library part RS_160K, "RES 160K OHM 1/10W 5% 0603 SMD", Storage Location="PCB Assembly WS", Supplier="ECE Dept"
R16 R17 R18 R19 R25: library part RS_1K, "RES 1.0K OHM 1/10W 5% 0603 SMD", Storage Location="PCB Assembly WS", Supplier="ECE Dept"
R20: library part RT_1R, "RES 1R OHM 1/4W 5% 1206 SMD", Storage Location="PCB Assembly WS", Supplier="ECE Dept"
R22: library part RS_51R, "RES 51 OHM 1/10W 5% 0603 SMD", Storage Location="PCB Assembly WS", Supplier="ECE Dept"
R26 R27: library part RS_2K2, "RES 2.2K OHM 1/10W 5% 0603 SMD", Storage Location="PCB Assembly WS", Supplier="ECE Dept"
R28: library part RS_10R, "RES 10 OHM 1/10W 5% 0603 SMD", Storage Location="PCB Assembly WS", Supplier="ECE Dept"
S1 S2 S3 S4: library part WS_EVQPNF05M, "Panasonic 6 x 3.5mm SMD Light Touch Switch Type SMD", Manufacturer=Panasonic, Supplier Part Number 1=2079481, Manufacturer PN=EVQPNF05M, PackageDescription="6.0 x 3.5 mm", Storage Location="PCB Assembly WS", Supplier="ECE Dept", Supplier 1=Farnell, Supplier 2=Digi-Key, Supplier Part Number 2=P13598SCT-ND
T1: library part TM_BSH105, "MOSFET N-CH 20V 1.05A SOT-23", Current - Continuous Drain (Id) @ 25° C=1.05A, Drain to Source Voltage (Vdss)=20V, Input Capacitance (Ciss) @ Vds="152pF @ 16V", Manufacturer="NXP Semiconductors", Package / Case="TO-236-3, SC-59, SOT-23-3", Power - Max=417mW, Supplier Part Number 1=1758066, FET Type="MOSFET N-Channel, Metal Oxide", Gate Charge (Qg) @ Vgs="3.9nC @ 4.5V", Manufacturer Part Number=BSH105,215, Pricing="1=0.53, 10=0.42, 25=0.3544, 100=0.2885, 250=0.23896, 500=0.1974, 1000=0.14785 (NZD)", Rds On (Max) @ Id, Vgs="200 mOhm @ 600mA, 4.5V", Storage Location="PCB Assembly WS", Supplier="ECE Dept", Supplier 1=Farnell, Supplier 2=Digi-Key, Supplier Part Number 2=568-6215-1-ND
TP1 TP2 TP3 TP4 TP5 TP6 TP7 TP8 TP9 TP10 TP11 TP12 TP13 TP14 TP15 TP16 TP17 TP18 TP19 TP20 TP21 TP22 TP23 TP24 TP25 TP26: library part TP_1206, "Test-Point 3.3x1.6x2.1mm SMD", Manufacturer="Harwin Inc", Manufacturer Part Number=S1751-46R, Supplier Part Number 1=952-1478-2-ND, Mounting Type="Surface Mount", Storage Location=ProtoPlace, Supplier="ECE Dept", Supplier 1=Digi-Key, Supplier 2=Farnell, Supplier Part Number 2=1826282, Type="PC Test Point"
U1: library part SE_ATSAM4S16BA-MU, "IC MCU 32BIT 512KB FLASH 64LQFP", Manufacturer=Atmel, Package / Case=64-LQFP, Supplier Part Number 1=ATSAM4S8BA-ANRCT-ND, Voltage - Supply (Vcc/Vdd)="1.62 V ~ 3.6 V", Code_JEDEC=MO-220VMMD-3, ComponentLink1Description="Manufacturer URL", ComponentLink1URL=http://www.atmel.com/, ComponentLink2Description="SAM4S Series Datasheet", ComponentLink2URL=http://www.atmel.com/dyn/resources/prod_documents/11100.pdf, ComponentLink3Description="SAM4S Series Summary", ComponentLink3URL=http://www.atmel.com/dyn/resources/prod_documents/11100S.pdf, Connectivity="I²C, IrDA, Memory Card, SPI, SSC, UART/USART, USB", Core Processor="ARM® Cortex®-M4", Core Size=32-Bit, Data Converters="A/D 11x12b, D/A 2x12b", Manufacturer Part Number=ATSAM4S8BA-ANR, Number of I/O=47, PackageDescription="64-Pin Quad Flat No-Lead (QFN) Sawn, 9 x 9 x 1.0 mm Body, 0.5 mm Pitch, Exposed Pad", PackageReference=64PS, PackageVersion="revJ, Jul-2007", Packaging="Cut Tape (CT)", Peripherals="Brown-out Detect/Reset, DMA, POR, PWM, WDT", Program Memory Size="512KB (512K x 8)", Program Memory Type=FLASH, RAM Size="128K x 8", Speed=120MHz, Supplier 1=Digi-Key
U2: library part NRF24, "nRF24 SMD Module", Warning="No power planes near or under device"
U3: library part ADP2302ARDZ-5.0-R7, "IC REG BUCK 5V 2A 8SOIC", Current - Output=2A, Frequency - Switching=700kHz, Supplier Part Number 1=ADP2302ARDZ-5.0-R7CT-ND, Voltage - Input (Max)=20V, Voltage - Output (Min/Fixed)=5V, ComponentLink1Description="ADP2302ARDZ-5.0 Datasheet", ComponentLink1URL=\\maxwell\elecapp\AltiumDesigner\Libraries\DatasheetsNew\ENCE461\ADP2302_2303.pdf, Manufacturer_Part_Number=ADP2302ARDZ-5.0-R7, Output Type=Fixed, Supplier 1=Digi-Key, Type=DEV, Vendor="Analog Devices Inc"
U4 U5: library part SV_CAT6219-330TDGT3, "IC REG LIN 3.3V 500MA TSOT23-5", Base Part Number=CAT6219, Current - Output=500mA, Package / Case="SOT-23-5 Thin, TSOT-23-5", Supplier Device Package=TSOT-23-5, Supplier Part Number=CAT6219-330TDGT3CT-ND, Voltage - Input (Max)=5.5V, Voltage - Output (Min/Fixed)=3.3V, Voltage Dropout (Max)="0.5V @ 500mA", ComponentLink1Description=http://www.onsemi.com/pub/Collateral/CAT6219-D.PDF, ComponentLink1URL=http://www.onsemi.com/pub/Collateral/CAT6219-D.PDF, ComponentLink2Description="CAT6219 Datasheet", ComponentLink2URL=\\maxwell\elecapp\AltiumDesigner\Libraries\DatasheetsNew\ENCE461\CAT6219-D.PDF, Manufacturer Part Number=CAT6219-330TDGT3, Supplier=Digi-Key, Supplier 1=Digi-Key
U6: "Accelerometer 3-Axis, +/-2 g / +/-4 g / +/-8 g / +/-16 g with Digital Output, 1.6 KHz BW, Industrial, 14-pin LGA, Tray", Manufacturer="Analog Devices", Supply Current="140 uA", Voltage Supply (V)="2.0 to 3.6", # of Axes=3, -3dB Bandwidth="1.6 KHz", ComponentLink1Description="Manufacturer URL", ComponentLink1URL=http://www.analog.com/en/index.html, ComponentLink2Description=Datasheet, ComponentLink2URL=http://www.analog.com/static/imported-files/data_sheets/ADXL345.pdf, ComponentLink3Description="Package Specification", ComponentLink3URL=http://www.analog.com/static/imported-files/data_sheets/ADXL343.pdf, ComponentLink4Description="Product URL", ComponentLink4URL=http://www.analog.com/en/mems-sensors/mems-inertial-sensors/adxl345/products/product.html, DatasheetVersion="Rev. D", Manufacturer 1="Analog Devices", Manufacturer Part Number 1=ADXL345BCCZ, Mounting Technology="Surface Mount", Output Type=Digital, PackageDescription="14-Pin Land Grid Array, 3 x 5 mm Body, 0.8 mm Pitch", PackageReference=CC-14-1, PackageVersion="03-16-2010-A, 03/2010", Packing=Tray, PartNumber=ADXL345BCCZ, Sensitivity="256/128/64/32 LSB/g"
U7: "1.8V - 5V level converter"
Y1: library part XT_CRYSTAL_12MHz_18pF, "CRYSTAL 12MHZ 18PF 6X3.5mm SMD", ESR (Equivalent Series Resistance)="60 Ohm", Frequency Stability=±50ppm, Frequency Tolerance=±30ppm, Load Capacitance=18pF, Manufacturer="CTS-Frequency Controls", Manufacturer Part Number=406C35D12M00000, Operating Mode=Fundamental, Operating Temperature="-20°C ~ 70°C", Package / Case="4-SMD, No Lead (DFN, LCC)", Supplier Part Number 1=CTX855CT-ND, Frequency=12MHz, Height="0.047\" (1.20mm)", Mounting Type="Surface Mount", Size / Dimension="0.236\" L x 0.138\" W (6.00mm x 3.50mm)", Supplier 1=Digi-Key

## Via types
v1: diameter 1, hole 0.5, Top Layer to Bottom Layer, 82 vias
v2: diameter 0.8, hole 0.3, Top Layer to Bottom Layer, tented top, 15 vias
v3: diameter 1, hole 0.5, Top Layer to Bottom Layer, tented top, 4 vias
v4: diameter 0.8, hole 0.3, Top Layer to Bottom Layer, 4 vias
v5: diameter 0.8, hole 0.5, Top Layer to Bottom Layer, tented top, 1 vias
v6: diameter 1.5, hole 0.75, Top Layer to Bottom Layer, 1 vias
v7: diameter 2, hole 1.5, Top Layer to Bottom Layer, 1 vias

## Nets (pads, with @x,y where several pads share a name; then routed paths per layer and width w, separated by ;. In a path a pad name is that pad's centre, name@x,y a point inside that pad or via, vN(x,y) a via of type N, cw(c..) or ccw(c..) an arc to the next point about the centre after c; other vN are vias at no path point)
3V3: C9.2 C11.2 C13.2 C15.2 C17.2 C21.2 H2.7 H2.8 P1.2 P2.2 P3.2 P4.2 R9.1 R13.1 R23.1 R26.2 R27.2 TP1.1 TP8.1 U1.1 U1.7 U1.18 U1.45 U1.58 U4.5 U6.7 U7.6 | length 46.2
  Top Layer w0.25: v2(25.025,63.25) U1.18 ; U1.7 32.75,67.25 v4(33.25,67.25) ; v2@33.75,55.854 33.759,55.845 34.155,55.845 34.25,55.75 U1.45 ; U1.1 35.75,65.5 v2(36.75,65.5) ; v2(36,60.25) 36.5,60.75 U1.58
  Top Layer w0.5: U4.5 19.449,43.45 v1(19.5,43.5) ; v1@19.45,43.45 C21.2 v1(21.25,41.75) ; C21.2@19.5,42 v1(19.5,43.5) ; R9.1 v1(24,54.25) ; v1(22.75,48) R13.1 ; U7.6 34.5,17.25 ; v1(38.875,39) v1@39,39 ; R27.2 v1@39,39 ; R26.2 39.873,38.777 39.473,38.777 39.25,39 v1@39,39 ; U6.7 U6.7@46.75,35.75 ; v1(49,34) 48.904,34.096 48.254,34.096 48,34.35 R23.1 46.773,34.877 46.773,35.727 U6.7@46.75,35.75 ; v1(49,35.75) U6.7@46.75,35.75
  Top Layer w1: 34.5,17.25 TP8.1 38.25,17.5 v1(40.75,17.5) ; v1(60.5,69.75) TP1.1
  Bottom Layer w0.25: v4(33.25,67.25) v4@33.3,67.25 ; v2(36,60.25) v2@36.05,60.3
  Bottom Layer w0.5: v2(25.025,63.25) 26.45,63.25 C11.2 ; v4(33.25,67.25) 33.25,65.55 C9.2 ; v2(33.75,55.95) 33.775,55.925 33.775,54.525 C13.2 ; v2(36,60.25) 37.45,60.25 C15.2 ; C17.2 36.2,64.869 36.75,65.419 v2(36.75,65.5)
3V3_B: C19.2 R8.2 TP23.1 U5.5 | length 9
  Top Layer w0.5: R8.2 5.5,60.75 5.654,60.596 v1@5.654,60.346 ; v1(7.75,46.25) U5.5 ; TP23.1 v1(9.25,49.5) 9.7,49.05 C19.2
  other v1: 5.75,60.5
5V: C18.2 C20.2 J1.2 R24.2 TP5.1 U4.1 U4.3 U5.1 | length 15.7
  Top Layer w0.5: v1(8.75,40.5) 8.846,40.596 8.846,41.446 C18.2 9.5,43.5 U5.1 ; R24.2 v1(11.5,38) ; v1(13.5,43.75) 13.85,43.4 C20.2 ; U4.3 15.199,39.051 v1(16.25,38) ; U4.1 15.199,43.064 15.75,43.615 v1(15.75,43.75)
  Top Layer w1: J1.2 23.75,39.25 TP5.1
5V_REG: C5.2 C6.2 J1.1 L2.2 R21.1 TP19.1 U3.5 U7.1 | length 48.4
  Top Layer w0.5: U3.5 16.75,27.466 16.75,28.75
  Top Layer w0.8: v1(28.5,7.75) R21.1 ; v1(30.5,17.75) 30.5,15.95 U7.1
  Top Layer w1: 16.75,28.75 16.689,28.811 16.689,33.439 19,35.75 J1.1 21.21,34.29 22.25,33.25 27,33.25 31,29.25 31,21 v1(30,20) ; L2.2 26,9.7 v1(26,9.75) ; v1(25.75,12.75) C6.2 ; TP19.1 26,7.25 v1(26.25,7.25) ; v1(28.25,11.25) C5.2
ACCEL_INT1: TP3.1 U1.48 U6.8 | length 21.2
  Top Layer w0.3: U1.48 35.775,54.45 35.775,53.475 43.75,45.5 TP3.1
  Top Layer w0.5: TP3.1 43.75,41.75 46,39.5 U6.8
ACCEL_INT2: TP6.1 U1.47 U6.9 | length 22.2
  Top Layer w0.3: U1.47 35.25,53.202 40.5,47.952 TP6.1
  Top Layer w0.5: TP6.1 40.5,42 41.25,41.25 43.093,41.25 45.2,39.143 U6.9
ACCEL_SCL: R26.1 TP7.1 U1.36 U6.14 | length 27.6
  Top Layer w0.25: 29.75,53.25 U1.36
  Top Layer w0.3: 29.75,53.25 28.66,52.16 28.66,51.862 28.65,51.852 28.65,43.855 TP7.1@35.5,37.005
  Top Layer w0.5: TP7.1@35.5,37.005 35.755,36.75 R26.1 40.5,36.65 40.5,35.773 40.523,35.75 U6.14
ACCEL_SDA: R27.1 TP4.1 U1.43 U6.13 | length 23.7
  Top Layer w0.25: U1.43 33.25,53.26 33.3,53.21 33.3,53.064 33.9,52.464 33.9,51.85
  Top Layer w0.3: TP4.1@33.9,42.35 33.9,51.85
  Top Layer w0.5: TP4.1@33.9,42.35 33.99,42.08 34.05,41.9 34,41.75 39.25,41.75 R27.1 41.99,39.01 41.99,37.485 U6.13
BATTERY_DETECT: R5.1 R7.2 TP9.1 U1.3 | length 65
  Top Layer w0.25: v1(19,34) 19.25,33.75 TP9.1 ; U1.3 34.75,68.25 v1(34.75,68.5)
  Top Layer w0.4: TP9.1 20.5,30.5 20.767,30.767 20.767,31.083 21.034,31.35 22.9,31.35 22.9,30.65 R5.1
  Top Layer w0.5: R5.1 R7.2
  Bottom Layer w0.3: v1(19,34) 16.75,34 12.1,38.65 12.1,52.661 27.939,68.5 v1(34.75,68.5)
BATTERY_IN: C7.2 C8.2 Q1.2 R5.2 R11.2 R12.2 U3.2 | length 14.7
  Top Layer w0.5: U3.2 21.997,24.865 22.501,24.361 v1@24.25,24.361 ; R5.2 21.5,30.5 21.5,29.5 21.75,29.25 v1(21.75,29) ; v1(24.25,24) 24.25,24.111 24.5,24.361 24.5,25.5 R11.2 26,25.5 C7.2 26.104,25.346 27.404,25.346 27.404,23.796 C8.2 ; R12.2 25.75,28 v1(26.25,28.5)
  Top Layer w1: Q1.2 10.75,21.75 11.25,22.25 v1(11.25,22.5)
  other v1: 27.5,25.5
BUZZER_PWM: R28.1 TP10.1 U1.44 | length 41.6
  Top Layer w0.25: U1.44 33.75,53.25 34.038,53.25 34.25,53.038
  Top Layer w0.3: TP10.1 4.336,45.377 4.375,45.375 6.676,45.375 ; R28.1 6.5,45.199 6.676,45.375 ; v1(14,46.25) 12.77,46.25 11.895,45.375 6.676,45.375 ; 34.25,53.038 34.75,52.538 v1(34.75,46)
  Bottom Layer w0.3: v1(14,46.25) 14.25,46.25 14.5,46 v1(34.75,46)
CH_1: R16.1 U1.52 | length 30.1
  Top Layer w0.25: 36.437,55.527 36.425,56.064 36.425,57.675 36.5,57.75 U1.52
  Top Layer w0.3: 36.437,55.527 36.437,55.063 v1(41,50.5) ; v1(53.5,38) 53.5,37 53.9,36.6 R16.1
  Bottom Layer w0.3: v1(41,50.5) v1(53.5,38)
CH_2: R18.1 U1.41 | length 35.6
  Top Layer w0.25: 32.25,52.952 U1.41 ; v1@54.25,34.797 v1(54.25,35)
  Top Layer w0.3: v1(31,50.75) 32.35,52.1 32.35,52.852 32.25,52.952 ; v1@54.25,34.797 54.6,34.447 R18.1
  Bottom Layer w0.3: v1(31,50.75) 38.5,50.75 v1(54.25,35)
CH_3: R17.1 U1.42 | length 38.5
  Top Layer w0.25: U1.42 32.75,53.124 32.85,53.024 32.85,50.6 ; v1(54.5,32) v1@54.6,31.9
  Top Layer w0.3: v1(31.5,49.25) 32.85,50.6 ; R17.1 v1@54.6,31.9
  Bottom Layer w0.3: v1(31.5,49.25) 39.129,49.25 53,35.379 53,33.5 v1(54.5,32)
CH_4: R19.1 U1.38 | length 42.5
  Top Layer w0.25: 30.5,53 30.75,53.25 U1.38
  Top Layer w0.3: v1(29.75,51.75) 30.1,52.1 30.1,52.6 30.5,53 ; v1(54.5,29) 54.5,27.7 R19.1
  Bottom Layer w0.3: v1(29.75,51.75) 29.75,49.798 31.798,47.75 39.922,47.75 52.5,35.172 52.5,30.75 54.25,29 v1(54.5,29)
D_N: H3.2 R3.1 | length 17.2
  Top Layer w0.381: R3.1 43,59.1 43.159,59.259 43.618,59.259 43.666,59.307 51.555,59.307 51.998,58.865 59.291,58.865 59.297,58.859 59.791,58.859 H3.2@59.792,58.857
D_P: H3.3 R2.1 | length 17.1
  Top Layer w0.381: R2.1 43,60.15 43.159,59.99 43.618,59.99 43.666,59.942 51.819,59.942 52.261,59.5 59.696,59.5 H3.3@59.74,59.545 ; H3.3@59.785,59.5 59.792,59.492 H3.3
DASTARDLY_CONTROL: S3.2 U1.34 | length 61.5
  Top Layer w0.25: v1(27.81,52.5) 28.75,53.44 U1.34
  Top Layer w0.3: v1(55.75,13.5) 56.5,12.75 S3.2
  Bottom Layer w0.25: v1(27.81,52.5) 27.81,50.595 31.13,47.275 39.725,47.275
  Bottom Layer w0.3: 39.725,47.24 49.1,37.865 49.1,37.125 51.25,34.975 51.25,18 v1(55.75,13.5)
GND: C1.1 C2.1 C4.1 C5.1 C6.1 C7.1 C8.1 C9.1 C10.1 C11.1 C12.1 C13.1 C14.1 C15.1 C16.1 C17.1 C18.1 C19.1 C20.1 C21.1 C23.1 C24.1 C25.1 C26.1 D1.1 H1.1 H1.3 H2.5 H2.6 H3.5 H3.6 P5.3 R4.1 R6.1 R7.1 R14.1 R20.1 S1.1 S2.1 S3.1 S4.1 T1.2 TP11.1 TP13.1 TP16.1 TP18.1 U1.2 U1.17 U1.46 U1.60 U2.2 U3.7 U3.EPAD U4.2 U5.2 U6.2 U6.4 U6.5 U6.12 U7.2 U7.5 | length 120.1
  Top Layer w0.25: U1.46 34.75,56 v2(35.5,56) ; v2@35,62.5 v2(35,62.75) ; U1.2 35.25,66.654 35.75,67.154 v4(35.75,67.25) ; v2(36.013,61.487) 36.161,61.487 36.424,61.75 U1.60
  Top Layer w0.3: v5(25.25,64.75) 25.25,64.5 26,63.75 U1.17
  Top Layer w0.4: v1(2.75,41.5) 2.85,41.4 T1.2 ; 10.5,42.55 U5.2 ; C18.1@10.525,42.525 10.8,42.25 10.9,42.15 C18.1 10.9,40.6 v1(11,40.5) ; v1(11.25,49.45) 11.25,47.75 C19.1 ; v1@13.75,39.5 v1(13.813,39.438) ; C20.1 C20.1@14.15,40.95 ; v1@21.088,39.5 v1(21.25,39.5) ; U6.2 42.829,33.996 42.829,32.171 43,32 C25.1 ; H3.5 H3.6@59.8,62
  Top Layer w0.5: C4.1@3.7,63.75 4.175,64.225 v1(4.175,64.825) 4.1,64.9 4.1,66.571 U2.2@3.7,66.971 ; C20.1@14.15,40.95 U4.2 ; v1(14.5,24.75) 14.5,24.865 U3.7 ; v1(15.776,47.974) 15.776,50.026 S2.1 ; C21.1 20.438,40.15 v1@21.088,39.5 ; R14.1 26.25,26.75 v1(26.25,27) ; v1(27.25,21.75) 27.385,21.75 28.188,22.553 28.753,22.553 29.05,22.85 C8.1 ; C5.1@28.25,15 U7.2 ; C24.1 v1(33.75,1.75) ; U7.5 v1(35.25,15) ; C1.1 42.6,68.25 42.793,68.443 43.443,68.443 v4(43.5,68.5) ; U6.2 U6.2@42.81,34.035 ; U6.12@42.81,37.465 U6.12 42.81,37.485 42.81,39.174 43.25,39.615 v1(43.25,39.75) ; v1(43,30.5) 43,30.9 43.4,31.3 C25.1 ; C26.1@44.41,32.24 44.41,34.015 U6.4 U6.5 ; C2.1 v4@46.2,62.95 ; C26.1 44.75,31.85 44.75,30.885 45,30.635 v1(45,30.5) ; R4.1 v1(61.5,49.75)
  Top Layer w0.8: H1.3 H1.3@4.21,14.583 ; v1@13.75,39.5 C20.1@13.75,40.55 ; S1.1 45.75,48.75 v1(48.5,48.75)
  Top Layer w1: v1(1,18.75) 2.75,18.75 TP11.1 ; H1.1 10.75,14.25 10.75,15 R6.1 ; D1.1 23,18.2 23,20.75 v1(25,20.75) ; C6.1 v1(25.75,17.75) ; R7.1 v1(27.5,30.5) ; C7.1 26,21.75 v1(27.25,21.75) ; C5.1@28.25,15 C5.1 v1(28.25,17.25) ; v1(50,5.75) 52.5,5.75 TP18.1 ; v1(50.75,76.75) TP16.1 ; v1(56.5,20) S4.1 ; v1(58.75,41.75) TP13.1 ; S3.1 v1(61,13.25) ; H3.6@62.5,56 62.5,58.5 62.5,60.5 H3.6@62.5,63
  Bottom Layer w0.25: v3@28.475,62.225 v3(28.5,62.25) ; v2(28.75,64) v2@28.8,64 ; C10.1 C10.1@33.5,64 ; v2@34.8,62.75 v2(35,62.75)
  Bottom Layer w0.3: v5(25.25,64.75) 25.3,64.7 C11.1
  Bottom Layer w0.5: C14.1 26.775,62.25 v3(28.5,62.25) ; v2(28.75,64) 28.75,65.45 C12.1 ; R20.1 29.891,57.509 29.891,59.241 v2(29.882,59.25) C23.1 ; C10.1 33.475,63.975 33.475,62.775 v2(33.5,62.75) ; C9.1 34.7,66.2 v4(35.75,67.25) ; C17.1 34.943,63.857 34.943,62.807 v2(35,62.75) ; C13.1 35.2,55.619 35.5,55.919 v2(35.5,56) ; v2(35.5,57.25) 35.55,57.3 C16.1 ; v2(36.013,61.487) 37.237,61.487 37.45,61.7 C15.1
  other v4: 46,63
  other v7: 19,25.5
"LED TAPE 3V3": TP17.1 U1.32 U7.4 | length 46.9
  Top Layer w0.25: U1.32 26.5,56.225 26.5,55.5
  Top Layer w0.3: 26.5,55.5 26,55 26,42.543 33,35.543 TP17.1 TP17.1@32.875,20.375 ; 32.25,14 33.15,14 U7.4 U7.4@33.025,14.225
  Top Layer w0.5: 32.25,14 32.2,14.05 32.2,17.7 32.875,18.375 TP17.1@32.875,20.375
"LED TAPE 5V": R22.1 TP15.1 U7.3 | length 7.9
  Top Layer w0.8: U7.3 30.875,13.975 30.875,12.375 31.75,11.5 31.75,7.75 R22.1
NetC1_2: C1.2 U1.62 Y1.3 | length 7.5
  Top Layer w0.25: U1.62 38.75,62.75 39.015,63.015 39.015,64.915 Y1.3
  Top Layer w0.5: Y1.3 C1.2
NetC2_2: C2.2 U1.61 Y1.1 | length 7.6
  Top Layer w0.25: U1.61 38.89,62.25 39.465,62.825 39.465,63.075 39.715,63.325 41.675,63.325 Y1.1
  Top Layer w0.5: Y1.1@43.4,61.55 C2.2
NetC3_1: C3.1 U3.1 | length 3
  Top Layer w0.5: C3.1 19.8,23.595 U3.1
NetC3_2: C3.2 D1.2 L2.1 U3.8 | length 3.2
  Top Layer w0.5: U3.8 18.4,23.595 C3.2
NetC4_2: C4.2 L1.1 U2.1 | length 5
  Top Layer w0.5: L1.1@2,62.25 2.05,62.25 2.05,63.25 C4.2 2.379,63.579 2.379,66.921 U2.1
NetC10_2: C10.2 C12.2 C14.2 C16.2 L3.2 U1.8 U1.12 U1.24 U1.54 | length 20.6
  Top Layer w0.25: U1.24 v3(28.5,60.25) ; v2(30.25,64) U1.12 ; v2@32,62.7 v2(32,62.75) 32.25,62.75 U1.8 ; v2(35.95,58.75) U1.54
  Top Layer w0.5: v2@32,62.7 v2(35.95,58.75)
  Bottom Layer w0.25: C10.2@32,64 C10.2 ; C16.2 C16.2@37.5,58.75
  Bottom Layer w0.5: C14.2 26.775,60.25 v3(28.5,60.25) ; C12.2 C12.2@30.25,65.45 ; L3.2@31.943,61.193 31.943,62.693 v2(32,62.75) ; v2@31.943,62.807 v2(32,62.75) ; C10.2 32.025,63.975 32.025,62.775 v2(32,62.75) ; v2(35.95,58.75) 36,58.7 C16.2
NetC22_1: C22.1 C23.2 L3.1 U1.64 | length 9.7
  Top Layer w0.25: U1.64 37.895,64.12 37.895,64.645 v2(38,64.75)
  Bottom Layer w0.25: L3.1 34.75,61.25 36.171,62.671 36.181,62.671 37,63.49 37,63.75 v2(38,64.75)
  Bottom Layer w0.5: C23.2 34.05,59.25 34.527,59.727 34.527,60.777 L3.1
NetC22_2: C22.2 R20.2 | length 1.7
  Bottom Layer w0.5: R20.2 34.2,57.5 C22.2
NetC24_2: C24.2 P5.1 R21.2 | length 4.6
  Top Layer w1: R21.2 30.25,4.46 P5.1 30.55,4.16 C24.2
NetC25_2: C25.2 C26.2 R23.2 U6.1 U6.6 | length 14.1
  Top Layer w0.5: U6.1 C25.2 42,30.156 42.606,29.55 45.394,29.55 46,30.157 C26.2 ; U6.6 C26.2 ; R23.2 47.3,32.55 46.825,32.075 46.075,32.075 C26.2
NetDL1_2: DL1.2 R9.2 | length 1.5
  Top Layer w0.5: DL1.2 21,55.65 R9.2
NetDL2_2: DL2.2 R13.2 | length 1.6
  Top Layer w0.5: R13.2 21.25,50.85 DL2.2
NetF1_1: F1.1 H1.2 | length 2.6
  Top Layer w1: H1.2 F1.1
NetF1_2: F1.2 Q1.3 | length 2.1
  Top Layer w1: F1.2 6.75,19.75 Q1.3
NetL1_2: L1.2 R8.1 | length 1.7
  Top Layer w0.5: L1.2@2,59.25 R8.1
NetP1_1: P1.1 R16.2 | length 2
  Top Layer w0.5: R16.2 P1.1
NetP2_1: P2.1 R17.2 | length 2
  Top Layer w0.5: R17.2 P2.1
NetP3_1: P3.1 R18.2 | length 2
  Top Layer w0.5: R18.2 P3.1
NetP4_1: P4.1 R19.2 | length 2
  Top Layer w0.5: R19.2 P4.1
NetP5_2: P5.2 R22.2 | length 2
  Top Layer w0.8: P5.2 R22.2
NetP7_1: P7.1 R24.1 R25.2 | length 8.5
  Top Layer w0.5: R25.2 R24.1 8.25,35.75 9.25,34.75 P7.1
NetP7_2: P7.2 R25.1 T1.3 | length 9.8
  Top Layer w0.5: P7.2 5.65,31 R25.1 5.6,38 T1.3
NetQ1_1: Q1.1 R6.2 | length 1.9
  Top Layer w0.8: Q1.1 10.75,18 R6.2
NetR2_2: R2.2 U1.57 | length 4
  Top Layer w0.25: U1.57 39,60.25
  Top Layer w0.3: 39,60.25 R2.2
NetR3_2: R3.2 U1.56 | length 4.3
  Top Layer w0.25: U1.56 38.687,59.75 38.914,59.75
  Top Layer w0.3: 38.903,59.725 39.066,59.562 40.188,59.562 40.75,59 R3.2
NetR11_1: R11.1 R14.2 U3.3 | length 3.8
  Top Layer w0.5: U3.3 21.311,25.569 R11.1@23.25,25.569 ; R11.1 R11.1@23.25,25.569 ; R14.2 R11.1@23.25,25.569
NetR12_1: R12.1 U3.4 | length 2.2
  Top Layer w0.5: U3.4 22,27.405 22.595,28 R12.1
NetR28_2: R28.2 T1.1 | length 1.4
  Top Layer w0.5: R28.2 6.55,42.75 T1.1
NetTP2_1: TP2.1 U1.55 | length 25.1
  Top Layer w0.25: U1.55 38.549,59.25 39.299,58.5 v1(39.75,58.5) ; v1(53.25,72.5) TP2.1
  Bottom Layer w0.25: v1(39.75,58.5) 53.25,72 v1(53.25,72.5)
nRST: H2.1 S1.2 U1.39 | length 26.8
  Top Layer w0.25: U1.39 31.25,52.75 v1(31.5,52.5)
  Top Layer w0.3: v1(42.75,53) 44.5,53 44.75,52.75 S1.2
  Bottom Layer w0.3: v1(31.5,52.5) 42.06,52.5 42.561,53 44,53 48,57 H2.1
PA19: P6.2 U1.13 | length 29.9
  Top Layer w0.25: U1.13 29.75,66.75
  Top Layer w0.3: 29.75,66.75 42.25,79.25 48.25,79.25 P6.2
PA20: P6.4 U1.16 | length 26.4
  Top Layer w0.25: U1.16 28.25,67
  Top Layer w0.3: 28.25,67 44,82.75 P6.4
PA21: P6.1 U1.11 | length 31.4
  Top Layer w0.25: U1.11 30.75,66.75
  Top Layer w0.3: 30.75,66.75 42.75,78.75 50.29,78.75 P6.1
PA22: P6.3 U1.14 | length 28
  Top Layer w0.25: U1.14 29.25,67
  Top Layer w0.3: 29.25,67 42.25,80 46.46,80 P6.3
RADIO_CE: TP22.1 U1.29 U2.3 | length 28.2
  Top Layer w0.25: 24.95,57.45 25.25,57.75 U1.29
  Top Layer w0.3: U2.3@4.729,67.25 5.25,66.729 5.25,63.5 11.75,57 24.5,57 24.95,57.45
RADIO_CLK: TP24.1 U1.21 U2.5 | length 24.1
  Top Layer w0.25: 25.25,61.75 U1.21
  Top Layer w0.3: U2.5@7.271,67.25 7.5,67.25 7.5,68.75 8.1,69.35 15.4,69.35 22.75,62 25,62 25.25,61.75
RADIO_CSN: TP21.1 U1.28 U2.4 | length 25.7
  Top Layer w0.25: 25.046,58.25 U1.28